# EAGLE board DealWithIt (EAGLE 9.0.0)
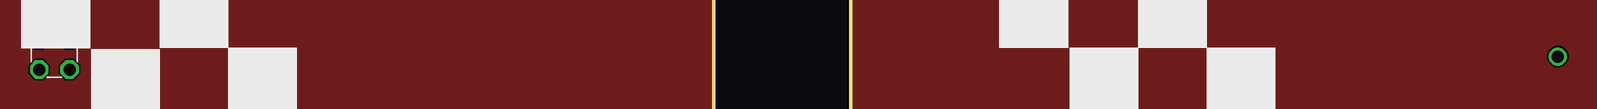
[diagram p0: board, top side]
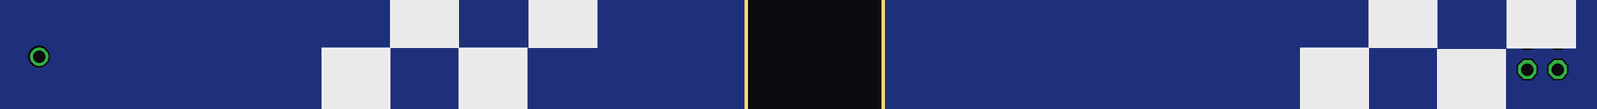
[diagram p1: board, bottom side, seen from below]

No outline drawn. Coordinates in mm, seen from the top.
Copper layers (1*16): Top 0.035mm / dielectric 1.5mm / Bottom 0.035mm
Design rules "default": minimum track width 6mil, minimum drill 0.35mm, track to track 6mil, track to pad 6mil, pad to pad 6mil, via to via 6mil, smd to smd 6mil, copper to edge 40mil, drill to drill 6mil, minimum pad ring 10mil, minimum via ring 8mil, stop-mask expansion 4mil, vias tented up to drill 0mil, thermal gap 10mil
Milling: 28 lines

## Footprints (pad centres in the part's own frame; a part is rotated, then mirrored left to right if it is on the bottom)
SHITTYHEADER = drill 1 octagon: GND 1.27,0; SCL -1.27,0; SDA -1.27,2.54; VCC 1.27,2.54

## Placement (x,y rotation side)
U$9  SHITTYADDONHEADER  [SHITTYHEADER]  15.29,62.52 0 top

## Library data of the parts
U$9 = MRRobotBadge

## Nets
3V3: U$9.VCC
SCL: U$9.SCL
SDA: U$9.SDA

## Tracks (layer width: path | path; a pad name or v marks a point on that pad's centre or on a via)
N$46  (via drill 1 pad 1.3)
  other vias: 140.6,63.6
S$1
  pour Top: 1.14,75.82 151,75.82 151,64.26 145.29,64.26 145.29,58.55 139.45,58.55 139.45,52.7 133.73,52.7 133.73,46.99 93.22,46.99 93.22,52.7 87.5,52.7 87.5,58.55 81.66,58.55 81.66,70.1 70.23,70.1 70.23,58.55 64.52,58.55 64.52,52.7 58.67,52.7 58.67,46.99 18.29,46.99 18.29,52.7 12.45,52.7 12.45,58.55 6.73,58.55 6.73,64.26 1.02,64.26 1.02,75.82
S$2
  pour Bottom: 1.02,75.82 151,75.82 151,64.26 145.29,64.26 145.29,58.55 139.45,58.55 139.45,52.7 133.73,52.7 133.73,46.99 93.22,46.99 93.22,52.7 87.5,52.7 87.5,58.55 81.66,58.55 81.66,70.1 70.23,70.1 70.23,58.55 64.52,58.55 64.52,52.7 58.67,52.7 58.67,46.99 18.29,46.99 18.29,52.7 12.45,52.7 12.45,58.55 6.73,58.55 6.73,64.26 1.02,64.26